# EAGLE board LED ir sensor (EAGLE 9.7.0)
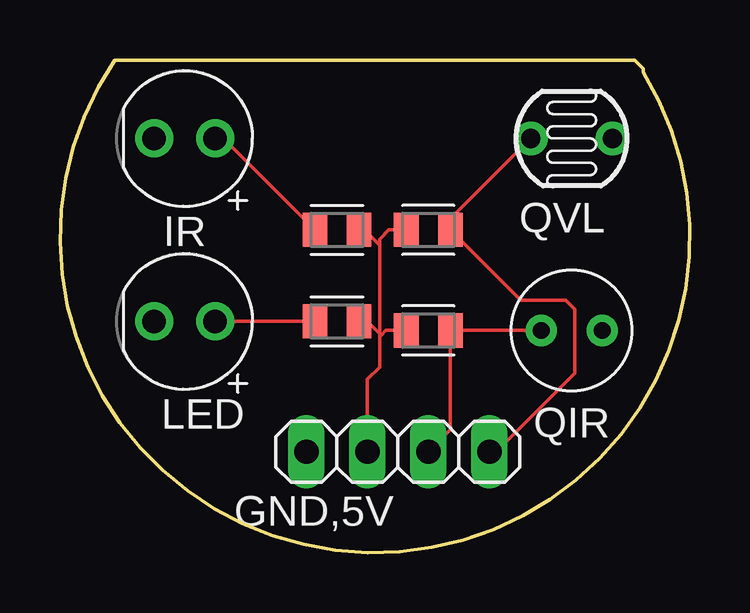
[diagram p0: board, top side]
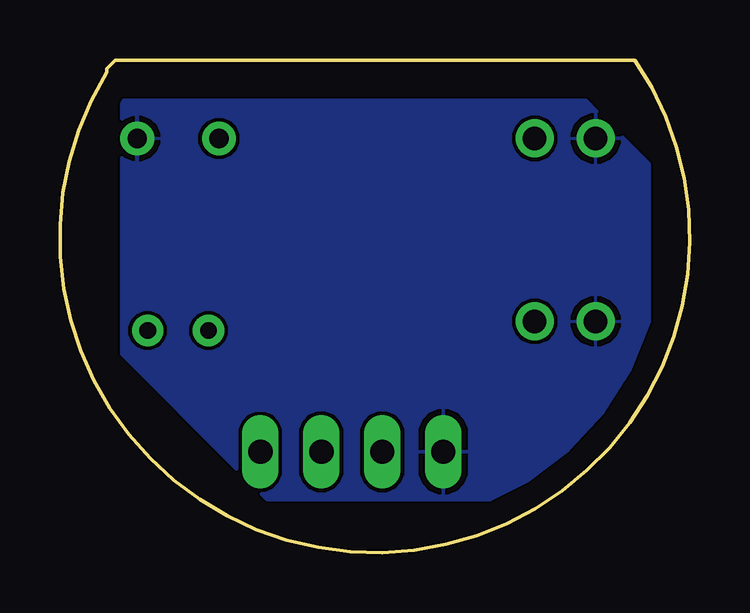
[diagram p1: board, bottom side, seen from below]

Size 26.24 x 20.52 mm. Coordinates in mm from the lower left corner, seen from the top.
Outline: 24.3,20 arc-246 2.28,20.52 23.94,20.52 24.3,20.17 24.3,20
Copper layers (1*16): Top / Bottom
Stack-up Default Layer Stack: Top SilkScreen Epoxy Ink / Top SolderMask SR:Green 0.0254mm Dk 4.3 / Top Surface Finish Lead-Free 0.02mm / Top CuFoil:007 0.035mm / Dielectric-1 User Defined 1.5mm / Bottom CuFoil:007 0.035mm / Bottom Surface Finish Lead-Free 0.02mm / Bottom SolderMask SR:Green 0.0254mm Dk 4.3 / Bottom SilkScreen Epoxy Ink
Design rules: minimum copper width 6mil, minimum drill size 0.35mm, copper clearance wire_polygon to wire_polygon 6mil, copper clearance wire_polygon to pad_smd 6mil, copper clearance wire_polygon to via 6mil, copper clearance pad_smd to pad_smd 6mil, copper clearance pad_smd to via 6mil, copper clearance via to via 6mil, copper clearance smd to pad (same net) 6mil, copper clearance smd to via (same net) 6mil, copper clearance smd to smd (same net) 6mil, dimension clearance 40mil, restrict clearance 0mil, via restrict clearance 0mil, drill distance 6mil, keepout clearance 0mil

## Footprints (pad centres in the part's own frame; a part is rotated, then mirrored left to right if it is on the bottom)
1X04 = drill 1.016 long: 1 -3.81,0; 2 -1.27,0; 3 1.27,0; 4 3.81,0
LEDRD254W60D565H860B_W = drill 0.981 pad 1.581: 1 -1.27,0; 2 1.27,0
SENRD254W50D503H320B = drill 0.7 pad 1.3: 1 -1.27,0; 2 1.27,0
GL5528 = drill 0.8 pad 1.4: 1 -1.702,0; 2 1.702,0
RESC2012X65 = smd 1.031 x 1.42: 1 -0.919,0; 2 0.919,0

## Placement (x,y rotation side)
GND,5V  PINHD-1X04_1X04M  [1X04]  14.08,4.2 180 top
IR  LED_WHITE  [LEDRD254W60D565H860B_W]  5.19,17.25 180 top
LED  LED_WHITE  [LEDRD254W60D565H860B_W]  5.19,9.63 180 top
QIR  PHOTOTRANSISTOR  [SENRD254W50D503H320B]  21.32,9.25 0 top
QVL  PHOTOCELL_GL5528  [GL5528]  21.32,17.25 180 top
R1  [RESC2012X65]  11.54,9.63 180 top
R2  [RESC2012X65]  15.35,9.25 0 top
R3  [RESC2012X65]  15.35,13.44 0 top
R6  [RESC2012X65]  11.54,13.44 180 top

## Library data of the parts
GND,5V QIR QVL = Tinkercad
IR LED = Tinkercad; CATEGORY: Opto-Electronic; SUB-CATEGORY: LED
R1-R3 R6 = Tinkercad; CATEGORY: Resistor; SUB-CATEGORY: Fixed

## Nets
5V: GND,5V.3 R1.1 R2.1 R3.1 R6.1
GND: GND,5V.4 IR.2 LED.2 QVL.1
N$2: IR.1 R6.2
N$3: LED.1 R1.2
N$4: QIR.2
SIG1: GND,5V.2 QIR.1 R2.2
SIG2: GND,5V.1 QVL.2 R3.2

## Tracks (layer width: path | path; a pad name or v marks a point on that pad's centre or on a via)
5V
  Top 0.152: GND,5V.3 12.81,7.22 13.32,7.73 13.32,9 | 13.32,9 13.32,12.81 | 13.32,12.81 12.68,13.44 R6.1 | 13.32,9 13.38,9.06 | 13.38,9.06 13.57,9.25 R2.1 | 13.32,12.81 13.32,13.06 13.7,13.44 R3.1 | 13.38,9.06 12.81,9.63 R1.1
GND
  pour Bottom: 1.63,16.24 4.3,18.9 23.73,18.9 23.73,8.24 17.64,2.14 6.21,2.14 2.78,5.57 2.78,7.09 1.63,8.24
N$2
  Top 0.152: R6.2 6.81,17.25 IR.1
N$3
  Top 0.152: R1.2 LED.1
SIG1
  Top 0.152: QIR.1 R2.2 16.27,5.12 GND,5V.2
SIG2
  Top 0.152: GND,5V.1 18.17,4.2 21.45,7.47 21.45,10.14 21.06,10.52 19.19,10.52 R3.2 16.27,13.91 QVL.2